# Altium PCB PCB_esp-32_2026-02-24.pcbdoc
Units mil, origin at the board's own origin, x right, y up, seen from the top; angles counter-clockwise.
Board outline 3965.45 x 2658.5 mil, 2 copper layers (Top Layer, Bottom Layer); 13 components, 29 nets, 96 pads, 41 vias.
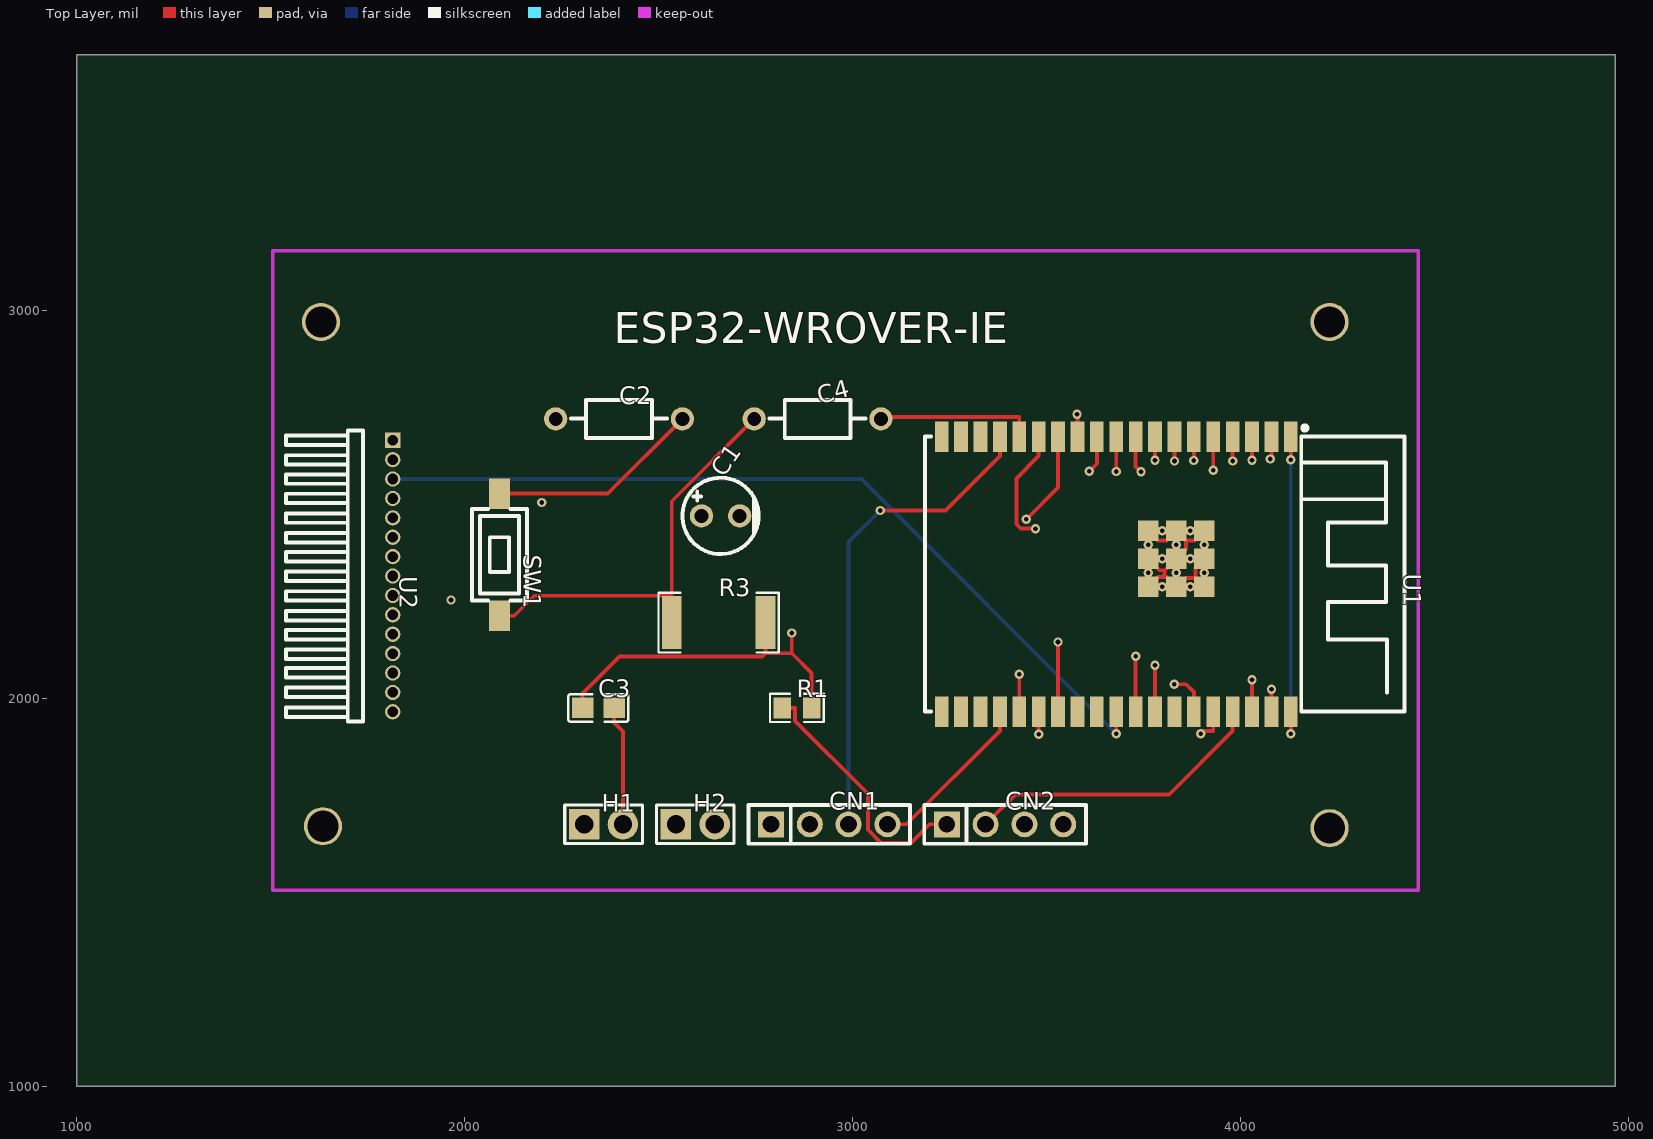
[diagram p0: Top Layer view]
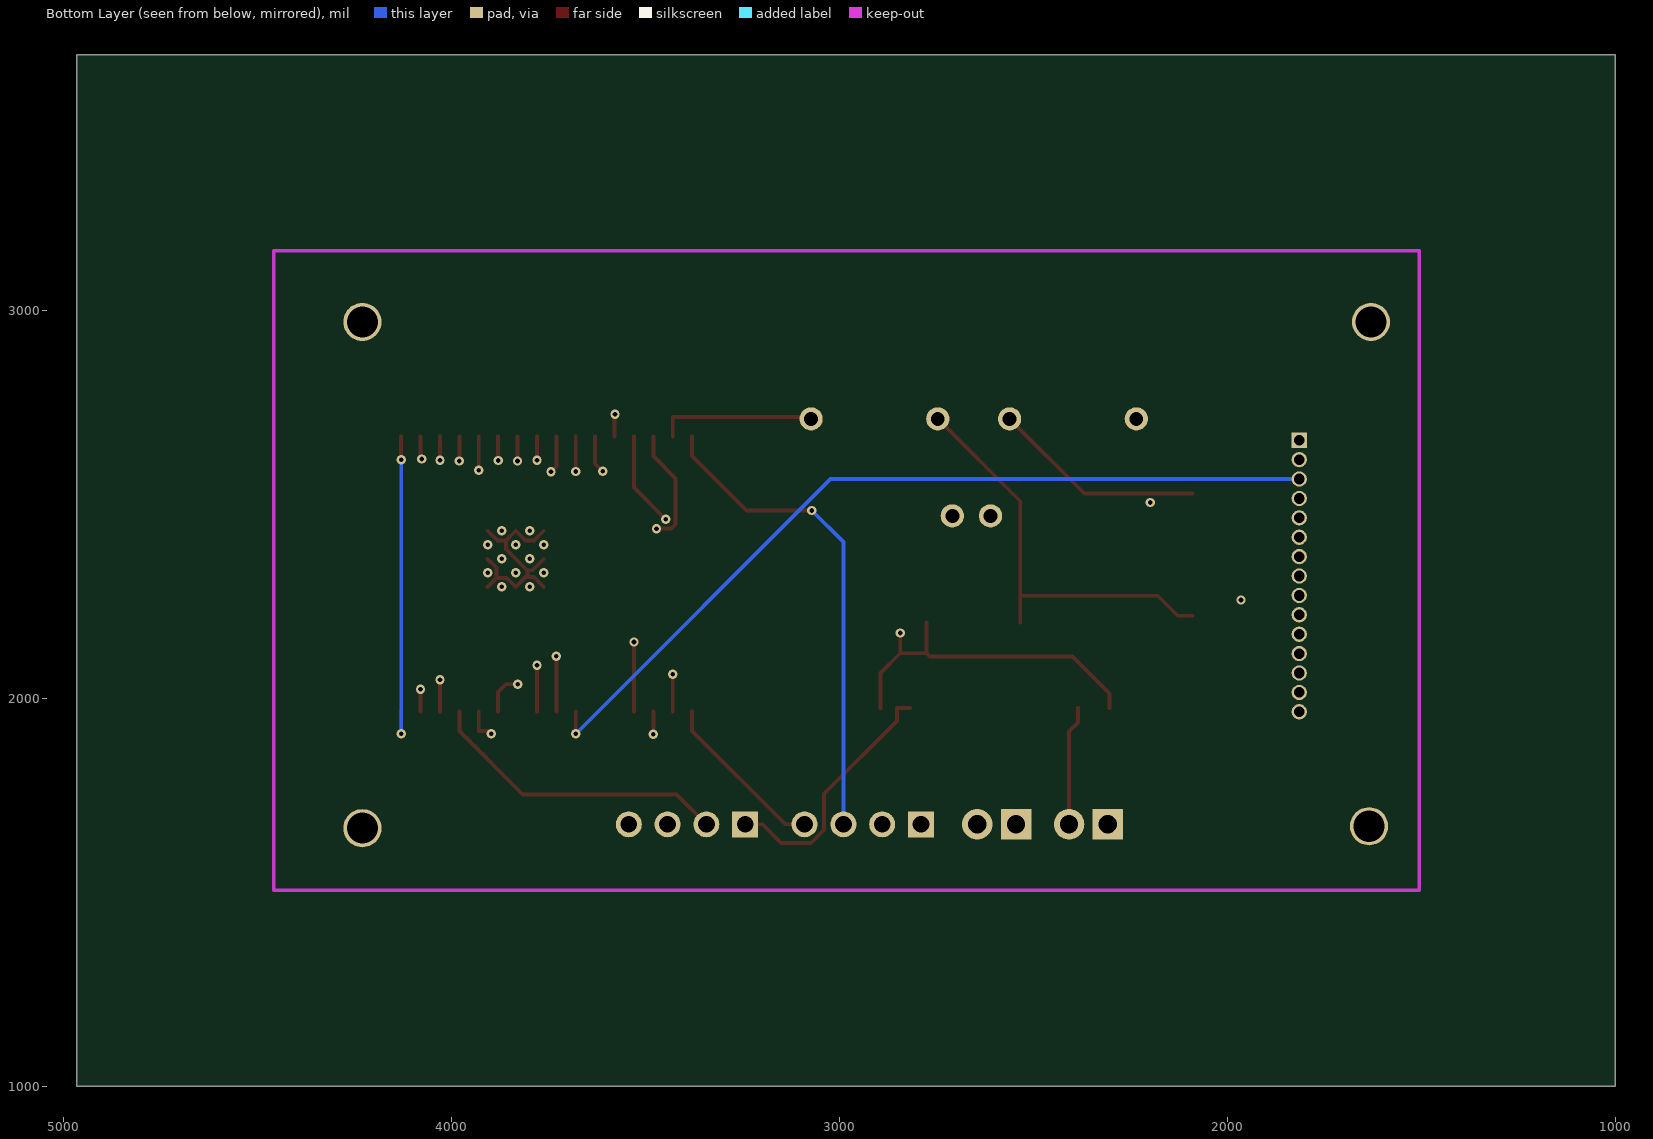
[diagram p1: Bottom Layer view, seen from below]

## Layer stack, top to bottom
Top Layer: signal copper (thickness not stored)
Dielectric: dielectric 12.6, FR-4, Dk 4.8
Bottom Layer: signal copper (thickness not stored)

## Board outline
4965.45,1000 1000,1000 1000,3658.5 4965.45,3658.5

## Components (designator, comment, footprint, x,y, rotation, side; value= is the part's Value field where it differs from the comment)
C1 "22uF" CAP-TH_BD5.0-P2.5-D0.5-FD 2659.4,2470 r0 top
C2 "100nF" CAP-TH_BD2.5-L4.3-P8.30-D0.5 2397.59,2720 r0 top
C3 "1uF" C0805 2344.4,1975 r0 top
C4 "100nF" CAP-TH_BD2.5-L4.3-P8.30-D0.5 2909.4,2720 r0 top
CN1 "JTAG" HDR-TH_4P-P2.54-V-F 2939.4,1675 r0 top
CN2 "UART" HDR-TH_4P-P2.54-V-F 3392.67,1675 r0 top
H1 "Boot Option" HDR-TH_2P-P2.54-V-M 2357.67,1675 r0 top
H2 "SENSOR" HDR-TH_2P-P2.54-V-M 2594.4,1675 r0 top
R1 "10kΩ" R0805 2856.21,1975 r0 top
R3 "0.001Ω" R2512 2654.4,2195 r0 top
SW1 "TD-1126SP-2.5H-160" SW-SMD_L6.1-W3.6-LS8.0 2089.4,2370 r270 top
U1 "ESP32-WROVER-IE(8MB)" WIFI-SMD_ESP32-WROVER-E 3679.4,2320 r270 top
U2 "IO PORT" HDR-TH_15P-P1.27-H-M-W7.0-N 1814.4,2315 r270 top

## Footprints (in the part's own frame and the unit in brackets; to place one, negate y for a bottom-side part, rotate by r counter-clockwise, add the part's x,y. Pads: shape width x height; smd on the part's side, far side on the other; paste and mask are expansions set on the pad)
C0805 [mm]
  rect 1.41x1.35 smd paste-100 mask+0.051: 1(-1.03,0) 2(1.03,0)
  silkscreen extent -1.96,-0.9 1.96,0.9
CAP-TH_BD2.5-L4.3-P8.30-D0.5 [mil]
  round 60 hole 35.43 paste+0 mask+2: 1(-163.39,0) 2(163.39,0)
  silkscreen extent -124,-49 124,49
CAP-TH_BD5.0-P2.5-D0.5-FD [mil]
  round 60 hole 36 paste+0 mask+2: 1(-49.21,0) 2(49.21,0)
  silkscreen extent -98,-98 98,98
HDR-TH_2P-P2.54-V-M [mm]
  rect 2x2 hole 1.2 paste+0 mask+0.051: 1(-1.27,0)
  round 2 hole 1.2 paste+0 mask+0.051: 2(1.27,0)
  silkscreen extent -2.54,-1.27 2.54,1.27
HDR-TH_4P-P2.54-V-F [mm]
  rect 1.7x1.7 hole 1.1 paste+0 mask+0.051: 1(-3.81,0)
  round 1.7 hole 1.1 paste+0 mask+0.051: 2(-1.27,0) 3(1.27,0) 4(3.81,0)
  silkscreen extent -5.29,-1.27 5.29,1.27
HDR-TH_15P-P1.27-H-M-W7.0-N [mm]
  rect 1x1 hole 0.7 paste+0 mask+0.05: 1(-8.89,0)
  round 1 hole 0.7 paste+0 mask+0.05: 2(-7.62,0) 3(-6.35,0) 4(-5.08,0) 5(-3.81,0) 6(-2.54,0) 7(-1.27,0) 8(0,0) 9(1.27,0) 10(2.54,0) 11(3.81,0) 12(5.08,0) 13(6.35,0) 14(7.62,0) 15(8.89,0)
  silkscreen extent -9.53,-7 9.53,-1.95
R0805 [mil]
  rect 44.59x54.21 smd paste-3937.01 mask+2: 1(-38.04,0) 2(38.04,0)
  silkscreen extent -69,-36 69,36
R2512 [mil]
  rect 50.49x136.06 smd paste-3937.01 mask+2: 1(-120.72,0) 2(120.72,0)
  silkscreen extent -155,-77 155,77
SW-SMD_L6.1-W3.6-LS8.0 [mm]
  rect 2x1.38 smd paste+0 mask+0.051: 1(-4,0) 2(4,0)
  silkscreen extent -3,-1.8 3,1.8
WIFI-SMD_ESP32-WROVER-E [mm]
  rect 2x0.9 smd paste+0 mask+0.051: 1(-9,11.43) 2(-9,10.16) 3(-9,8.89) 4(-9,7.62) 5(-9,6.35) 6(-9,5.08) 7(-9,3.81) 8(-9,2.54) 9(-9,1.27) 10(-9,0) 11(-9,-1.27) 12(-9,-2.54) 13(-9,-3.81) 14(-9,-5.08) 15(-9,-6.35) 16(-9,-7.62) 17(-9,-8.89) 18(-9,-10.16) 19(-9,-11.43) 20(9,-11.43) 21(9,-10.16) 22(9,-8.89) 23(9,-7.62) 24(9,-6.35) 25(9,-5.08) 26(9,-3.81) 27(9,-2.54) 28(9,-1.27) 29(9,0) 30(9,1.27) 31(9,2.54) 32(9,3.81) 33(9,5.08) 34(9,6.35) 35(9,7.62) 36(9,8.89) 37(9,10.16) 38(9,11.43)
  rect 1.33x1.33 smd paste+0 mask+0.051: 39(-2.835,5.765) 39(-2.835,3.93) 39(-2.835,2.095) 39(-1,5.765) 39(-1,3.93) 39(-1,2.095) 39(0.835,3.93) 39(0.835,2.095) 39(0.835,5.765)
  silkscreen extent -9.72,-12.53 9,18.87

## Free pads (board coordinates)
  round 98.42 hole 35.98 paste+4 mask+2.01: 2(1634.4,1670) 3(4229.39,1665) 4(1629.4,2970) 5(4229.39,2970)
  round 80 hole 80 unplated paste+0: ""(1629.4,2970) ""(1634.4,1670) ""(4229.4,1665) ""(4229.4,2970)

## Via types
v1: diameter 24, hole 12, Top Layer to Bottom Layer, tented both sides, 41 vias

## Nets (pads, with @x,y where several pads share a name; then routed paths per layer and width w, separated by ;. In a path a pad name is that pad's centre, name@x,y a point inside that pad or via, vN(x,y) a via of type N, cw(c..) or ccw(c..) an arc to the next point about the centre after c; other vN are vias at no path point)
+3.3V: C1.1 C2.1 CN2.1 R1.1 U1.2 | length 4116.1
  Top Layer w10: R1.1 2851.47,1975 2851.47,1941.7 3039.4,1753.77 3039.4,1660.94 3073.26,1627.08 3150.28,1627.08 3198.2,1675 CN2.1 ; v1(4076.21,2616.57) 4076.21,2620.75 4079.4,2623.94 U1.2
  Mid-Layer 1 w10: C2.1 2337.63,2616.57 2610.19,2616.57 ; C1.1 2610.19,2616.57 ; v1(4076.21,2616.57) 4056.08,2636.7 2630.32,2636.7 2610.19,2616.57
  Mid-Layer 3 w10: CN2.1 3287.15,1675 3287.15,1686.12 3362.54,1761.51 3420,1761.51 4076.21,2417.72 v1(4076.21,2616.57)
GND: C1.2 C2.2 C3.2 C4.2 CN2.4 H1.2 SW1.1 U1.1 U1.15 U1.38 | length 5574.8
  Top Layer w10: SW1.1 2368.46,2527.48 C2.2 ; C3.2 2384.95,1937.42 2407.67,1914.7 H1.2 ; C4.2 3077.54,2724.75 3429.35,2724.75 3429.4,2724.7 U1.15 ; v1(4129.07,1908.26) 4129.07,1914.96 4129.4,1915.29 U1.38 ; v1(4129.07,2614.92) 4129.07,2623.61 4129.4,2623.94 U1.1
  Mid-Layer 1 w10: C4.2 3083.93,2708.86 4035.13,2708.86 v1(4129.07,2614.92) ; CN2.4 3895.81,1675 v1(4129.07,1908.26)
  Mid-Layer 2 w10: H1.2 2708.61,1975.94 C1.2 2822.79,2470 C4.2
  Mid-Layer 4 w10: C2.2 2708.61,2572.37 C1.2
  Bottom Layer w10: v1(4129.07,1908.26) v1(4129.07,2614.92)
IO2: U1.24 U2.1 | length 1960.9
  Top Layer w10: U1.24 v1(3429.4,2061.72)
  Mid-Layer 1 w10: U2.1 1845.1,2665 2448.38,2061.72 v1(3429.4,2061.72)
IO4: U1.26 U2.2 | length 2088.9
  Top Layer w10: U1.26 v1(3529.4,2144.86)
  Mid-Layer 5 w10: U2.2 2284.54,2144.86 v1(3529.4,2144.86)
IO5: U1.29 U2.3 | length 2194.8
  Top Layer w10: v1(3679.4,1908.04) U1.29
  Bottom Layer w10: U2.3 3022.44,2565 v1(3679.4,1908.04)
IO12: CN1.2 U1.14 | length 1306.9
  Top Layer w10: v1(3471.35,2437.22) 3433.22,2437.22 3422.07,2448.37 3422.07,2566.61 3479.4,2623.94 U1.14
  Mid-Layer 2 w10: CN1.2 3471.35,2256.95 v1(3471.35,2437.22)
IO13: CN1.3 U1.16 | length 1259.6
  Top Layer w10: v1(3070.91,2483.92) 3239.38,2483.92 3379.4,2623.94 U1.16
  Bottom Layer w10: CN1.3 2989.4,2402.41 v1(3070.91,2483.92)
IO14: CN1.1 U1.13 | length 1305.8
  Top Layer w10: v1(3447.74,2461.26) 3529.4,2542.92 U1.13
  Mid-Layer 2 w10: CN1.1 2789.4,1719.48 3447.74,2377.82 v1(3447.74,2461.26)
IO15: CN1.4 U1.23 | length 439.9
  Top Layer w10: CN1.4 3139.11,1675 3379.4,1915.29 U1.23
IO18: U1.30 U2.4 | length 2226.2
  Top Layer w10: U1.30 v1(3729.4,2108.52)
  Mid-Layer 5 w10: U2.4 2201,2128.4 2843.28,2128.4 2850.03,2121.65 3716.27,2121.65 v1(3729.4,2108.52)
IO19: U1.31 U2.5 | length 2241.5
  Top Layer w10: U1.31 v1(3779.4,2084.6)
  Mid-Layer 5 w10: U2.5 2167.05,2112.35 2836.63,2112.35 2848.16,2100.82 3657.11,2100.82 3673.33,2084.6 v1(3779.4,2084.6)
IO21: U1.33 U2.6 | length 2280.6
  Top Layer w10: v1(3828.8,2035.99) 3859.46,2035.99 3879.4,2016.05 U1.33
  Mid-Layer 1 w10: U2.6 1835.26,2415 2214.27,2035.99 v1(3828.8,2035.99)
IO22: U1.36 U2.7 | length 2440
  Top Layer w10: U1.36 v1(4029.4,2047.42)
  Mid-Layer 5 w10: U2.7 2083.1,2096.3 2829.98,2096.3 2841.51,2084.77 3440.54,2084.77 3464.38,2060.93 3798.44,2060.93 3812.6,2075.09 4001.73,2075.09 v1(4029.4,2047.42)
IO23: U1.37 U2.8 | length 2460.2
  Top Layer w10: U1.37 v1(4079.4,2023.15)
  Mid-Layer 5 w10: U2.8 2090.73,2038.67 3798.88,2038.67 3819.25,2059.04 3838.36,2059.04 3874.25,2023.15 v1(4079.4,2023.15)
IO25: U1.10 U2.9 | length 2096.9
  Top Layer w10: v1(3679.4,2584.41) U1.10
  Mid-Layer 1 w10: U2.9 1826.15,2253.25 v1@1964.4,2253.25
  Mid-Layer 3 w10: v1@1964.4,2253.25 3348.24,2253.25 v1(3679.4,2584.41)
  other v1: 1964.4,2253.25
IO26: U1.11 U2.10 | length 2046.3
  Top Layer w10: v1(3609.89,2584.8) 3629.4,2604.31 U1.11
  Mid-Layer 2 w10: U2.10 2103.74,2504.34 v1(2198.14,2504.34)
  Mid-Layer 3 w10: v1(2198.14,2504.34) 2278.6,2584.8 v1(3609.89,2584.8)
IO27: U1.12 U2.11 | length 2069.7
  Top Layer w10: v1(3578.27,2732.22) 3579.4,2731.09 U1.12
  Mid-Layer 3 w10: U2.11 1879.55,2230.15 1879.55,2251.47 2291.95,2663.87 3509.92,2663.87 v1(3578.27,2732.22)
IO32: U1.8 U2.12 | length 2254.6
  Top Layer w10: v1(3779.11,2613.39) 3779.4,2613.68 3779.4,2623.94 U1.8
  Mid-Layer 3 w10: U2.12 1941.35,2241.95 1941.35,2280.15 2274.59,2613.39 v1(3779.11,2613.39)
IO33: U1.9 U2.13 | length 2240.1
  Top Layer w10: U1.9 3729.4,2597.68 v1(3743.31,2583.77)
  Mid-Layer 3 w10: U2.13 3224.54,2065 v1(3743.31,2583.77)
IO34: U1.6 U2.14 | length 2374.1
  Top Layer w10: v1(3879.4,2612.87) U1.6
  Mid-Layer 3 w10: U2.14 3281.53,2015 v1(3879.4,2612.87)
IO35: U1.7 U2.15 | length 2345.6
  Top Layer w10: v1(3829.4,2611.52) U1.7
  Mid-Layer 4 w10: U2.15 3182.88,1965 v1(3829.4,2611.52)
SENSOR_VN: H2.2 U1.5 | length 1758.8
  Top Layer w10: v1(3929.4,2587.66) U1.5
  Mid-Layer 2 w10: H2.2 2644.4,1690.52 3438.19,2484.31 3826.05,2484.31 v1(3929.4,2587.66)
SENSOR_VP: H2.1 U1.4 | length 1906.4
  Top Layer w10: v1(3979.4,2611.49) U1.4
  Mid-Layer 2 w10: H2.1 3477.25,2607.85 3751.84,2607.85 3776.74,2582.95 3892.09,2582.95 3920.63,2611.49 v1(3979.4,2611.49)
SW1_2: C4.1 R3.1 SW1.2 | length 1078.6
  Top Layer w10: SW1.2 2127.58,2212.52 2179.22,2264.16 2533.68,2264.16 ; R3.1 2533.68,2264.16 ; C4.1 2533.68,2507.67 2533.68,2264.16
U1_3: C3.1 R1.2 R3.2 U1.3 | length 2363.5
  Top Layer w10: C3.1@2303.85,1975 2303.85,2012.59 2399.07,2107.81 2766.97,2107.81 2775.12,2115.96 ; R3.2 2775.12,2115.96 ; v1(2842.83,2167.97) 2842.83,2115.96 ; R1.2 2894.25,2013.12 2894.25,2064.54 2842.83,2115.96 ; v1(4029.4,2613.6) U1.3 ; 2775.12,2115.96 2842.83,2115.96
  Mid-Layer 4 w10: v1(2842.83,2167.97) 3311.3,2636.44 4006.56,2636.44 v1(4029.4,2613.6)
U1_25: H1.1 U1.25 | length 1326.4
  Top Layer w10: v1(3479.4,1907.22) U1.25
  Mid-Layer 3 w10: H1.1 2539.89,1907.22 v1(3479.4,1907.22)
U1_34: CN2.3 U1.34 | length 636.6
  Top Layer w10: v1(3897.09,1908.14) 3904.24,1915.29 3929.4,1915.29 U1.34
  Mid-Layer 2 w10: CN2.3 3644.82,1877.15 3866.1,1877.15 v1(3897.09,1908.14)
U1_35: CN2.2 U1.35 | length 786.6
  Top Layer w10: CN2.2 3419.62,1751.95 3816.06,1751.95 3979.4,1915.29 U1.35
U1_39: U1.39 | length 600.9
  Top Layer w10: U1.39@3761.89,2287.13 3786.82,2312.06 3803.72,2312.06 ; U1.39@3761.89,2359.36 3791.23,2330.02 3803.72,2330.02 ; U1.39@3761.89,2431.61 3786.83,2406.67 3809.19,2406.67 3834.13,2431.61 U1.39@3859.08,2406.66 ; U1.39@3906.37,2287.12 U1.39@3883.31,2310.18 ; U1.39@3906.37,2359.36 3883.31,2336.3 U1.39@3883.31,2310.18 ; U1.39@3906.37,2431.61 3881.42,2406.66 U1.39@3859.08,2406.66 ; 3803.72,2312.06 3803.72,2330.02 ; 3803.72,2312.06 3809.2,2312.06 3834.13,2287.13 3857.18,2310.18 U1.39@3883.31,2310.18 ; 3803.72,2330.02 3804.79,2330.02 3834.13,2359.36 3859.08,2384.31 U1.39@3859.08,2406.66
pads on no net: U1.17 U1.18 U1.19 U1.20 U1.21 U1.22 U1.27 U1.28 U1.32
copper on no net:
  other v1: 3797.99,2287.13 3870.23,2287.12 3761.89,2323.22 3834.13,2323.22 3906.37,2323.22 3797.99,2359.36 3870.23,2359.36 3761.89,2395.47 3834.13,2395.47 3906.37,2395.47 3797.99,2431.61 3870.23,2431.61

## Silkscreen, mask and mechanical layers (free items; w line width, h text height)
Top Overlay:
  text "ESP32-WROVER-IE" at 2384.4,2915 h80